# Altium PCB AMTOSC.PcbDoc
Units mm, origin at the board's own origin, x right, y up, seen from the top; angles counter-clockwise.
Board outline 50 x 50 mm, 4 copper layers (Top Layer, Layer 2, Layer 3, Bottom Layer), stack 1.513 mm thick; 38 components, 22 nets, 94 pads, 130 vias.
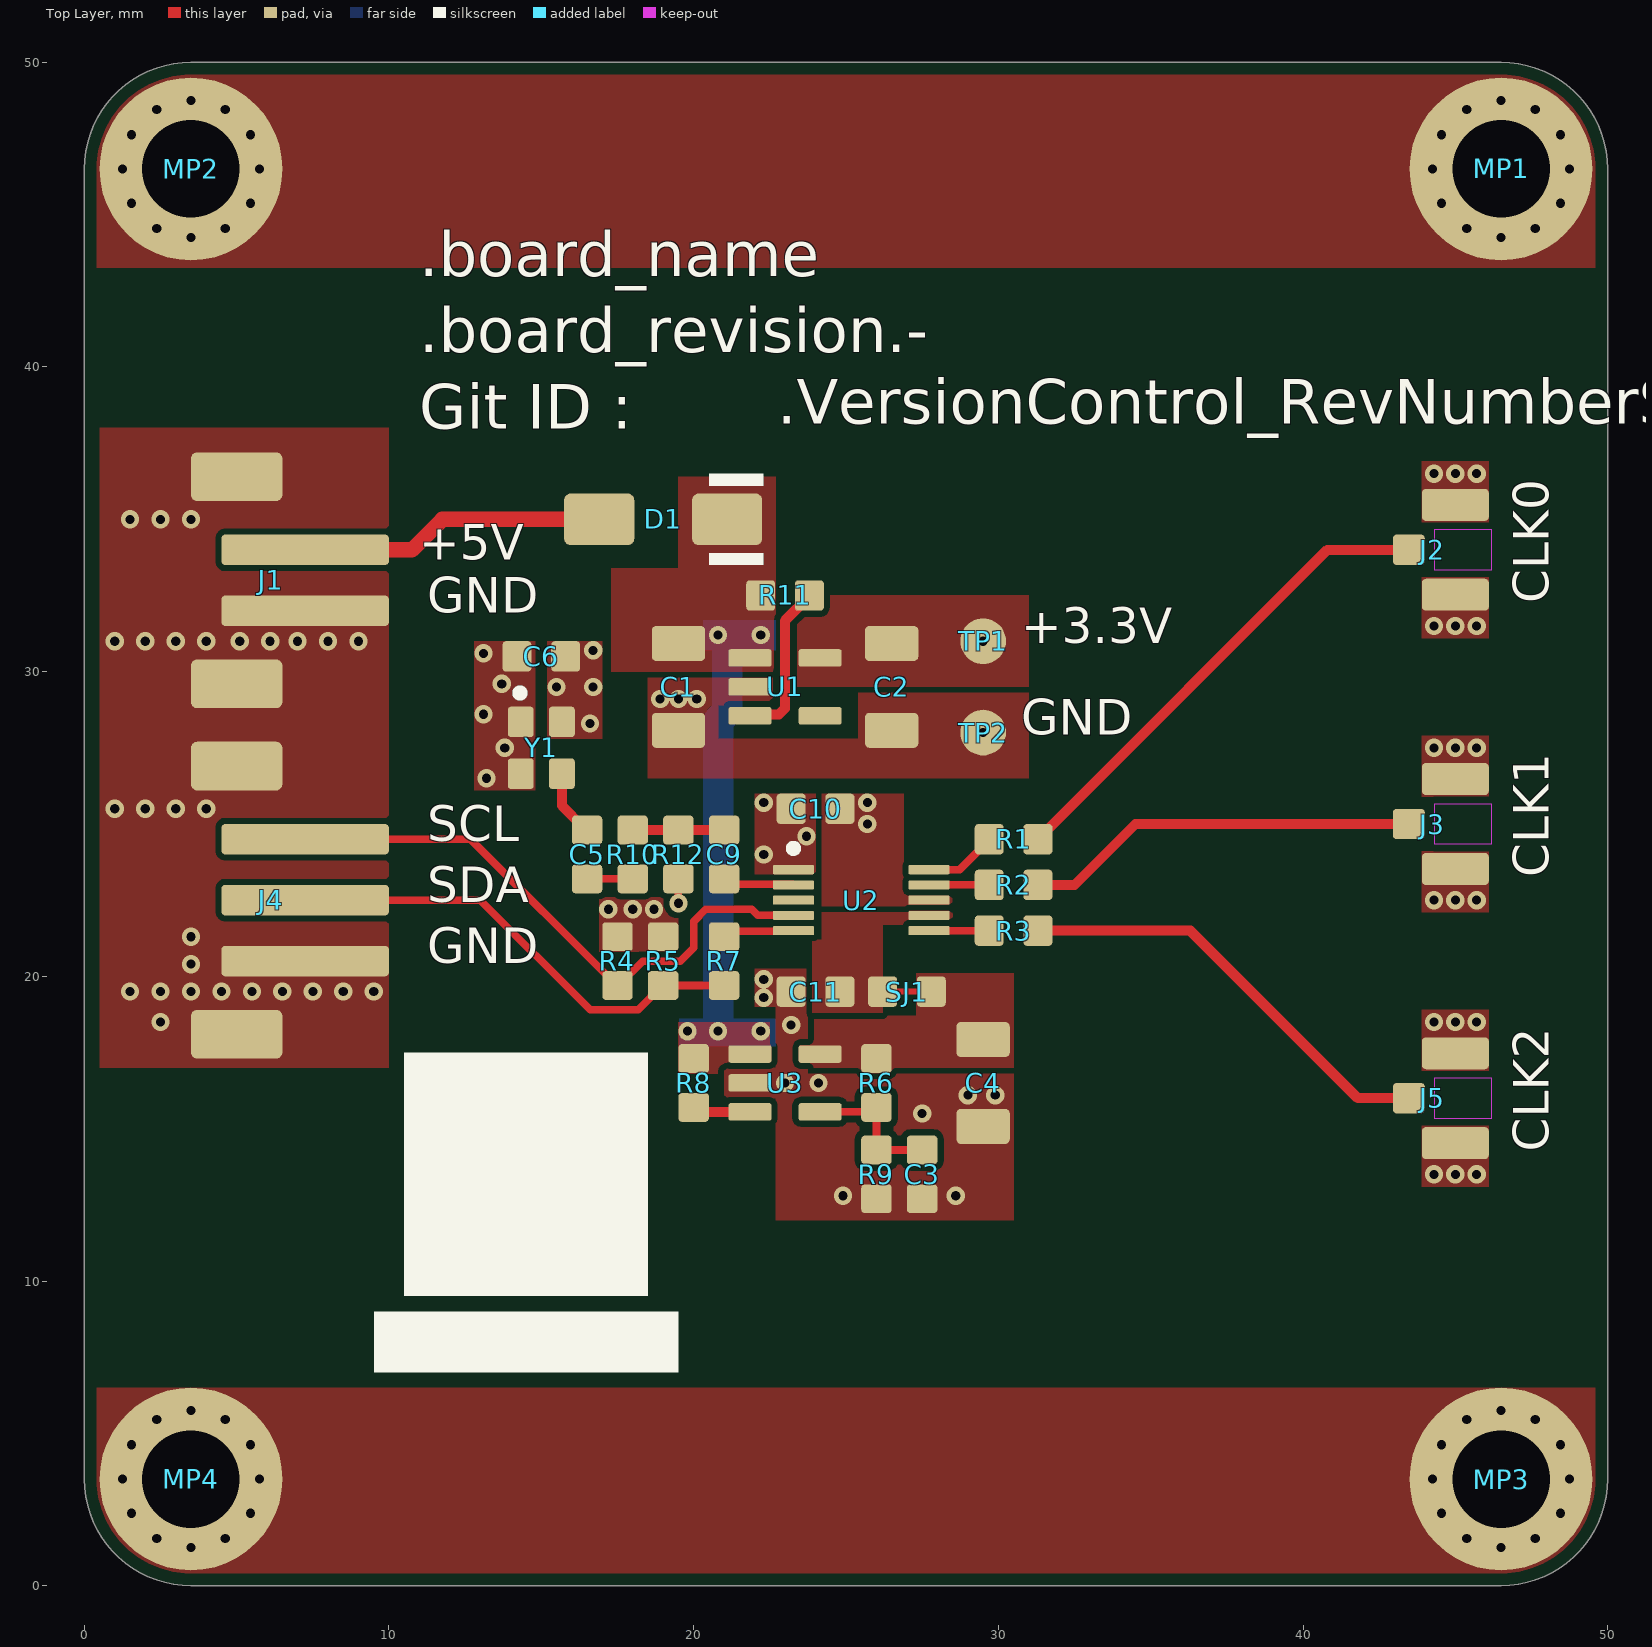
[diagram p0: Top Layer view]
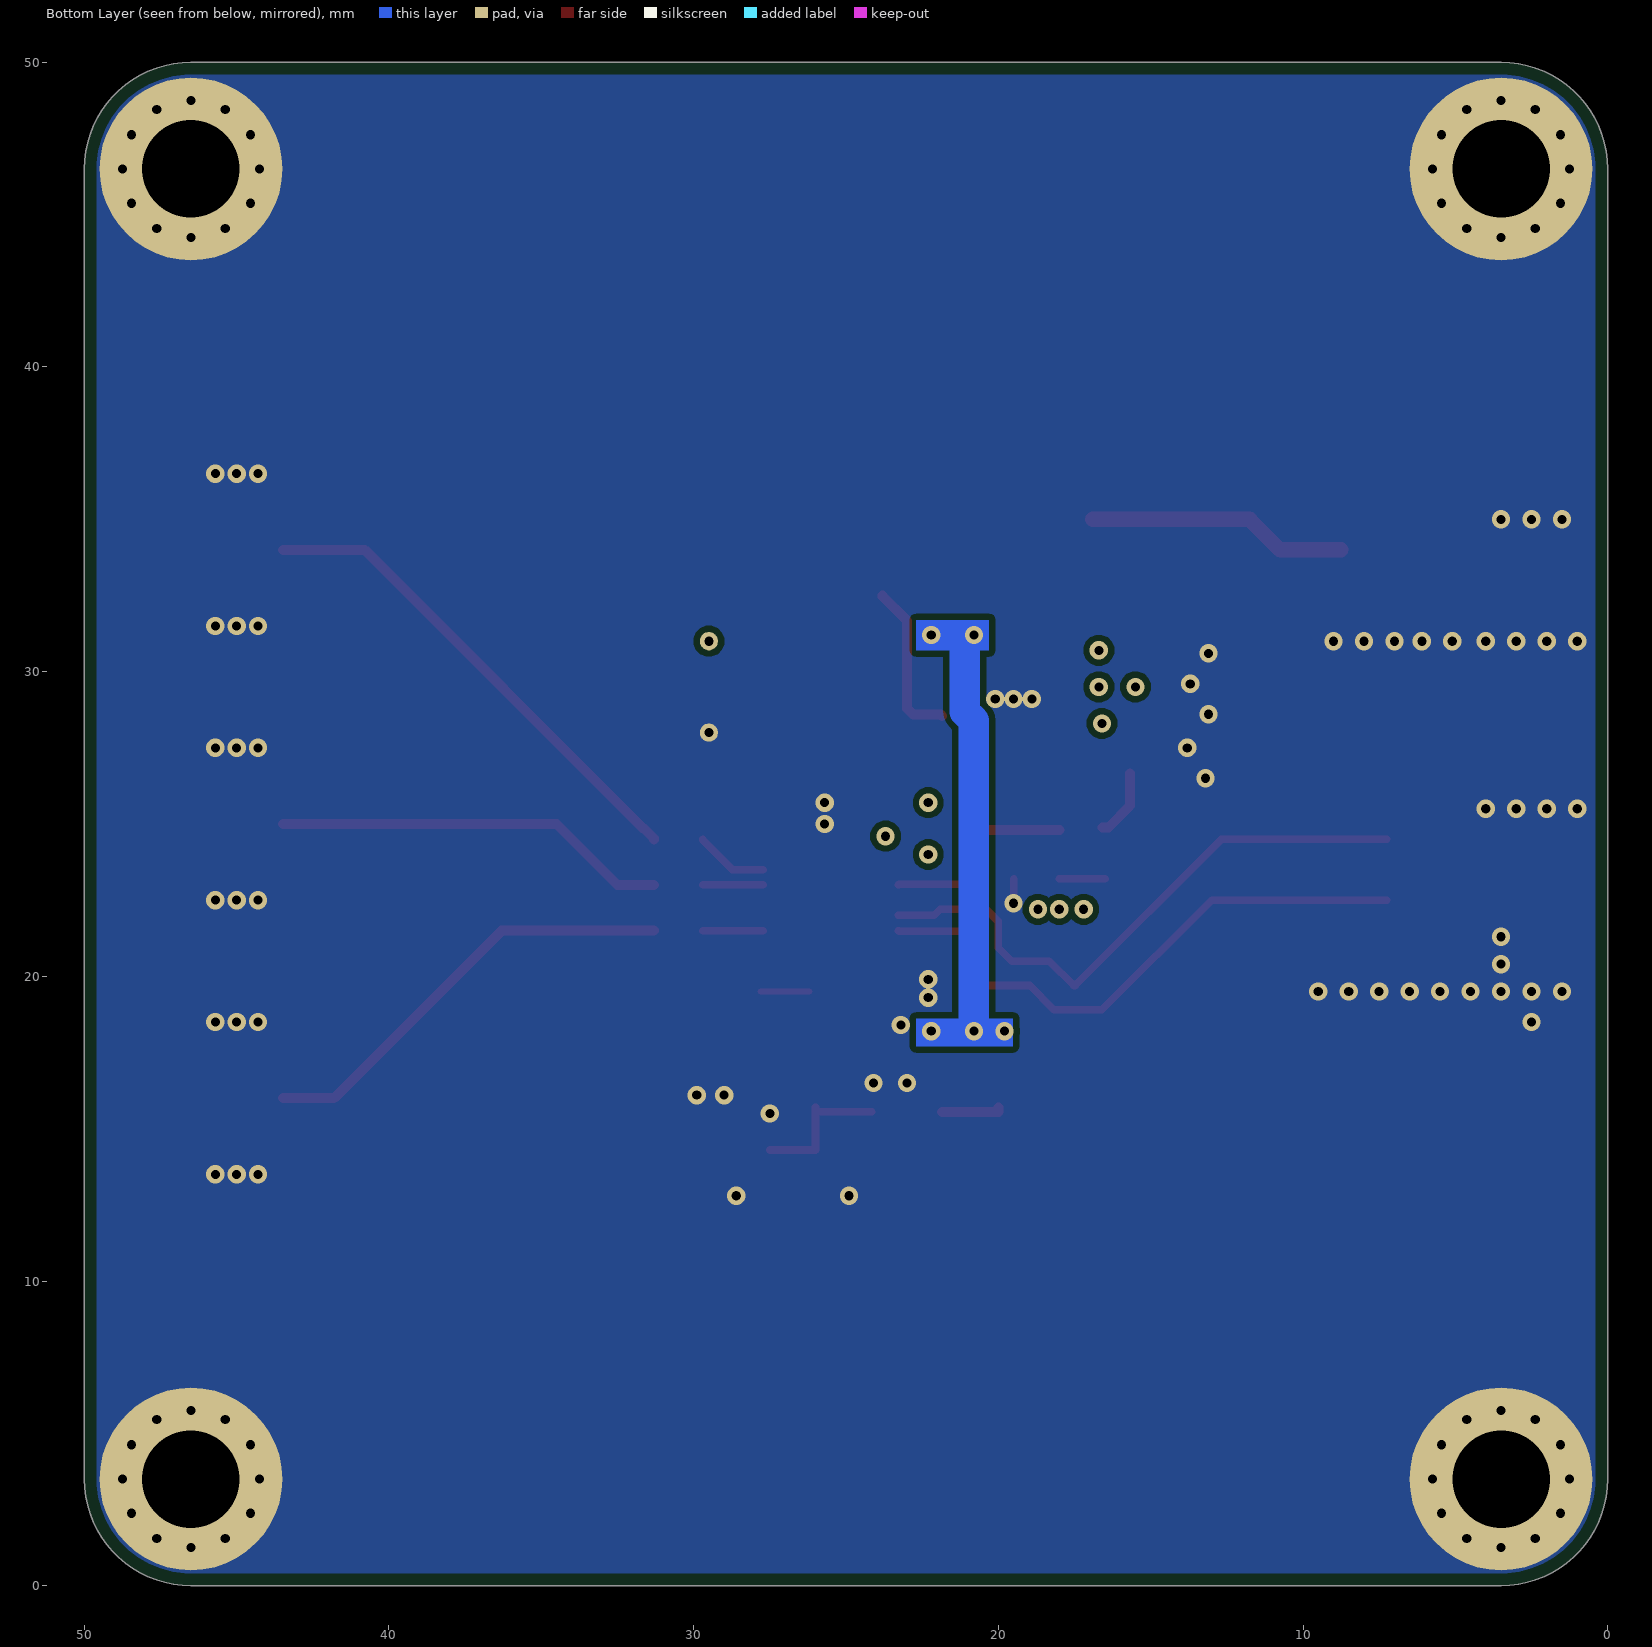
[diagram p1: Bottom Layer view, seen from below]
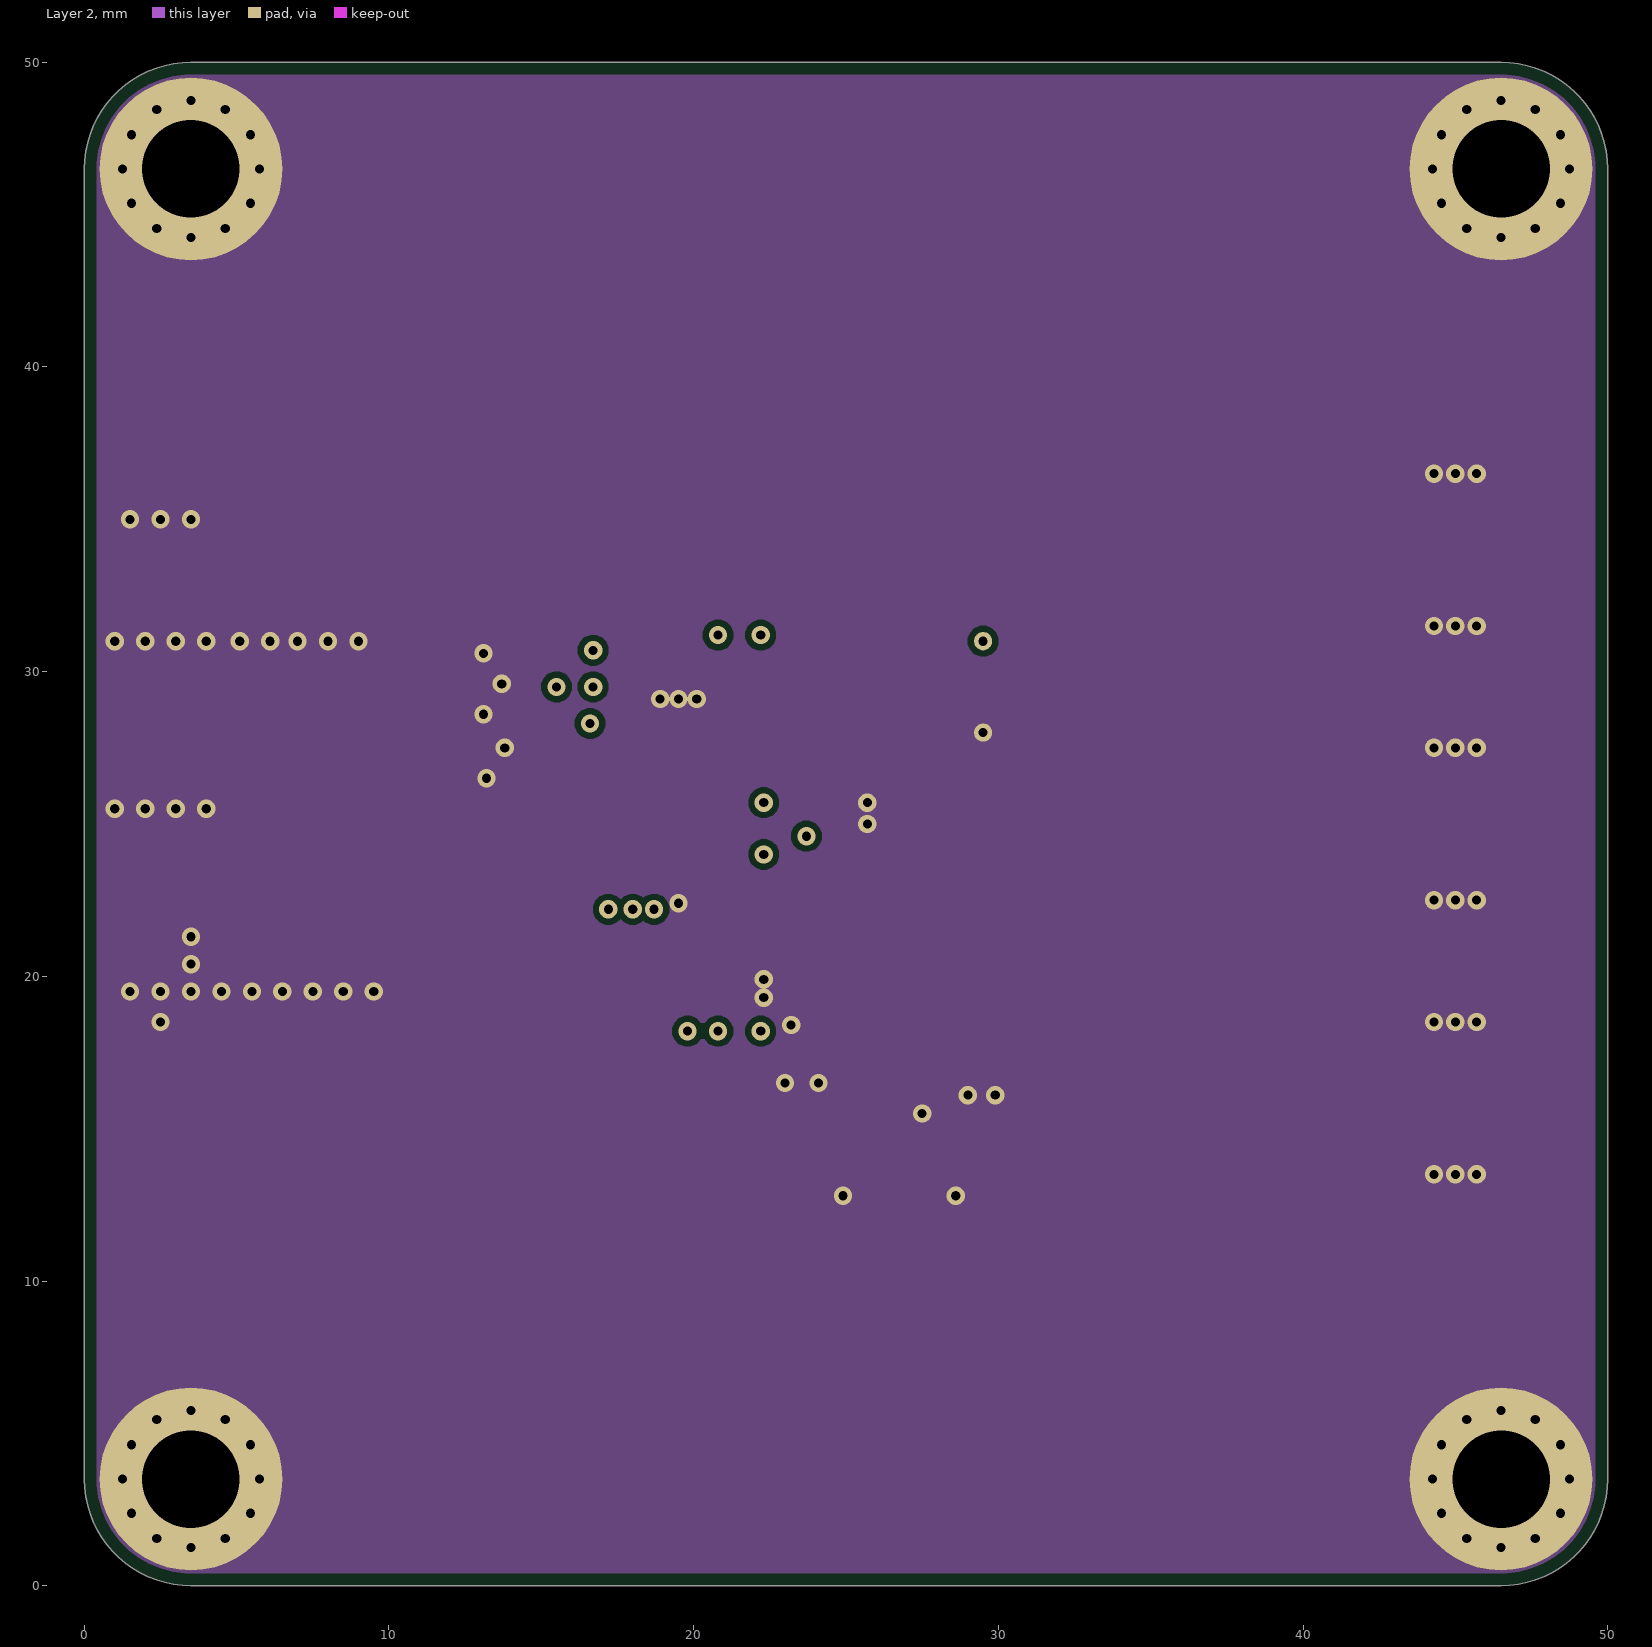
[diagram p2: Layer 2]
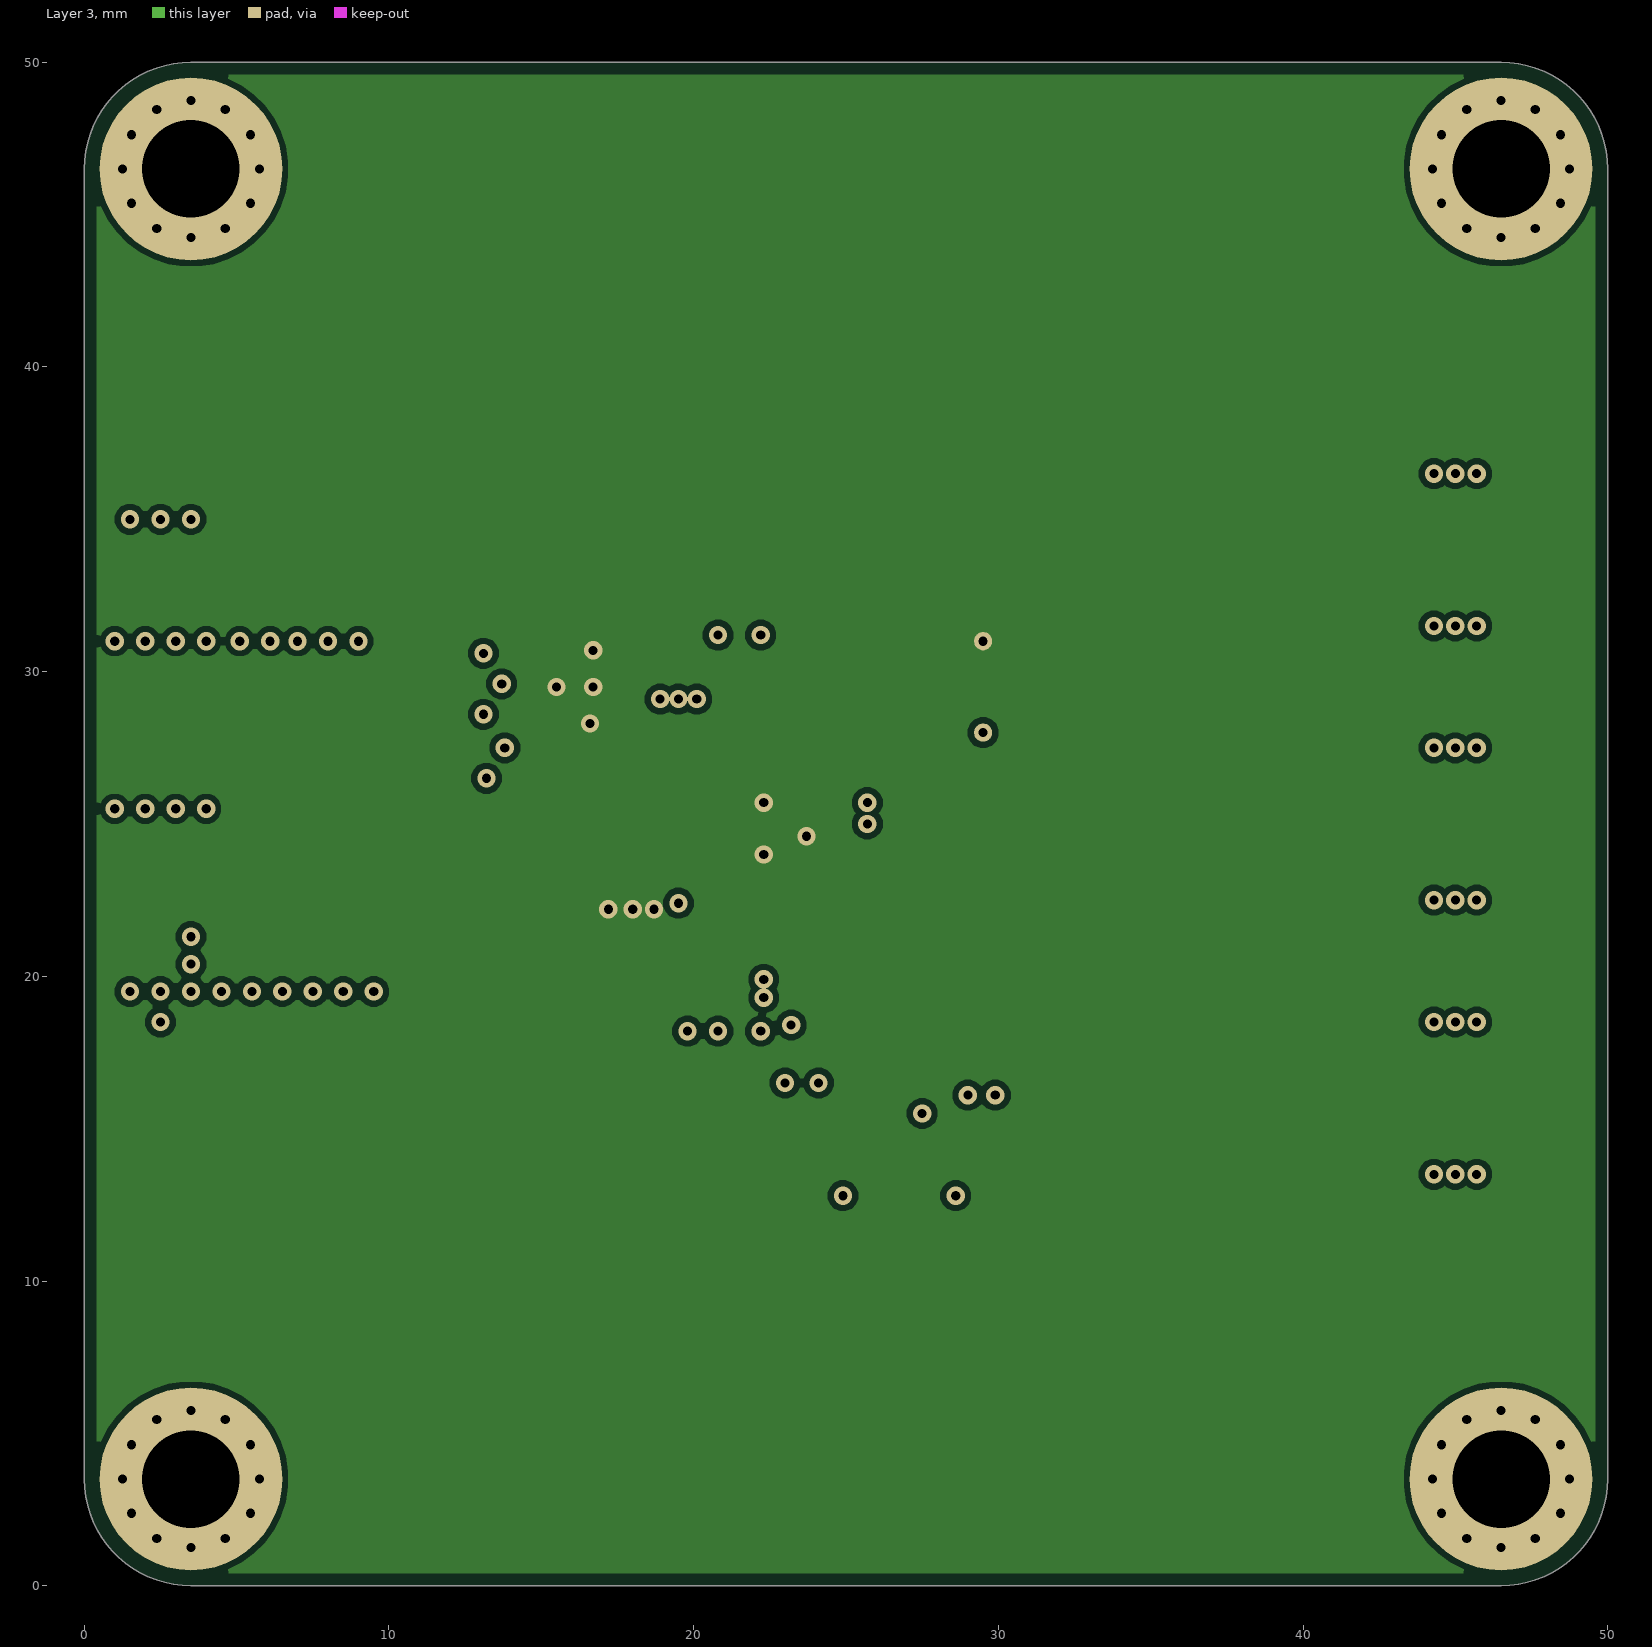
[diagram p3: Layer 3]
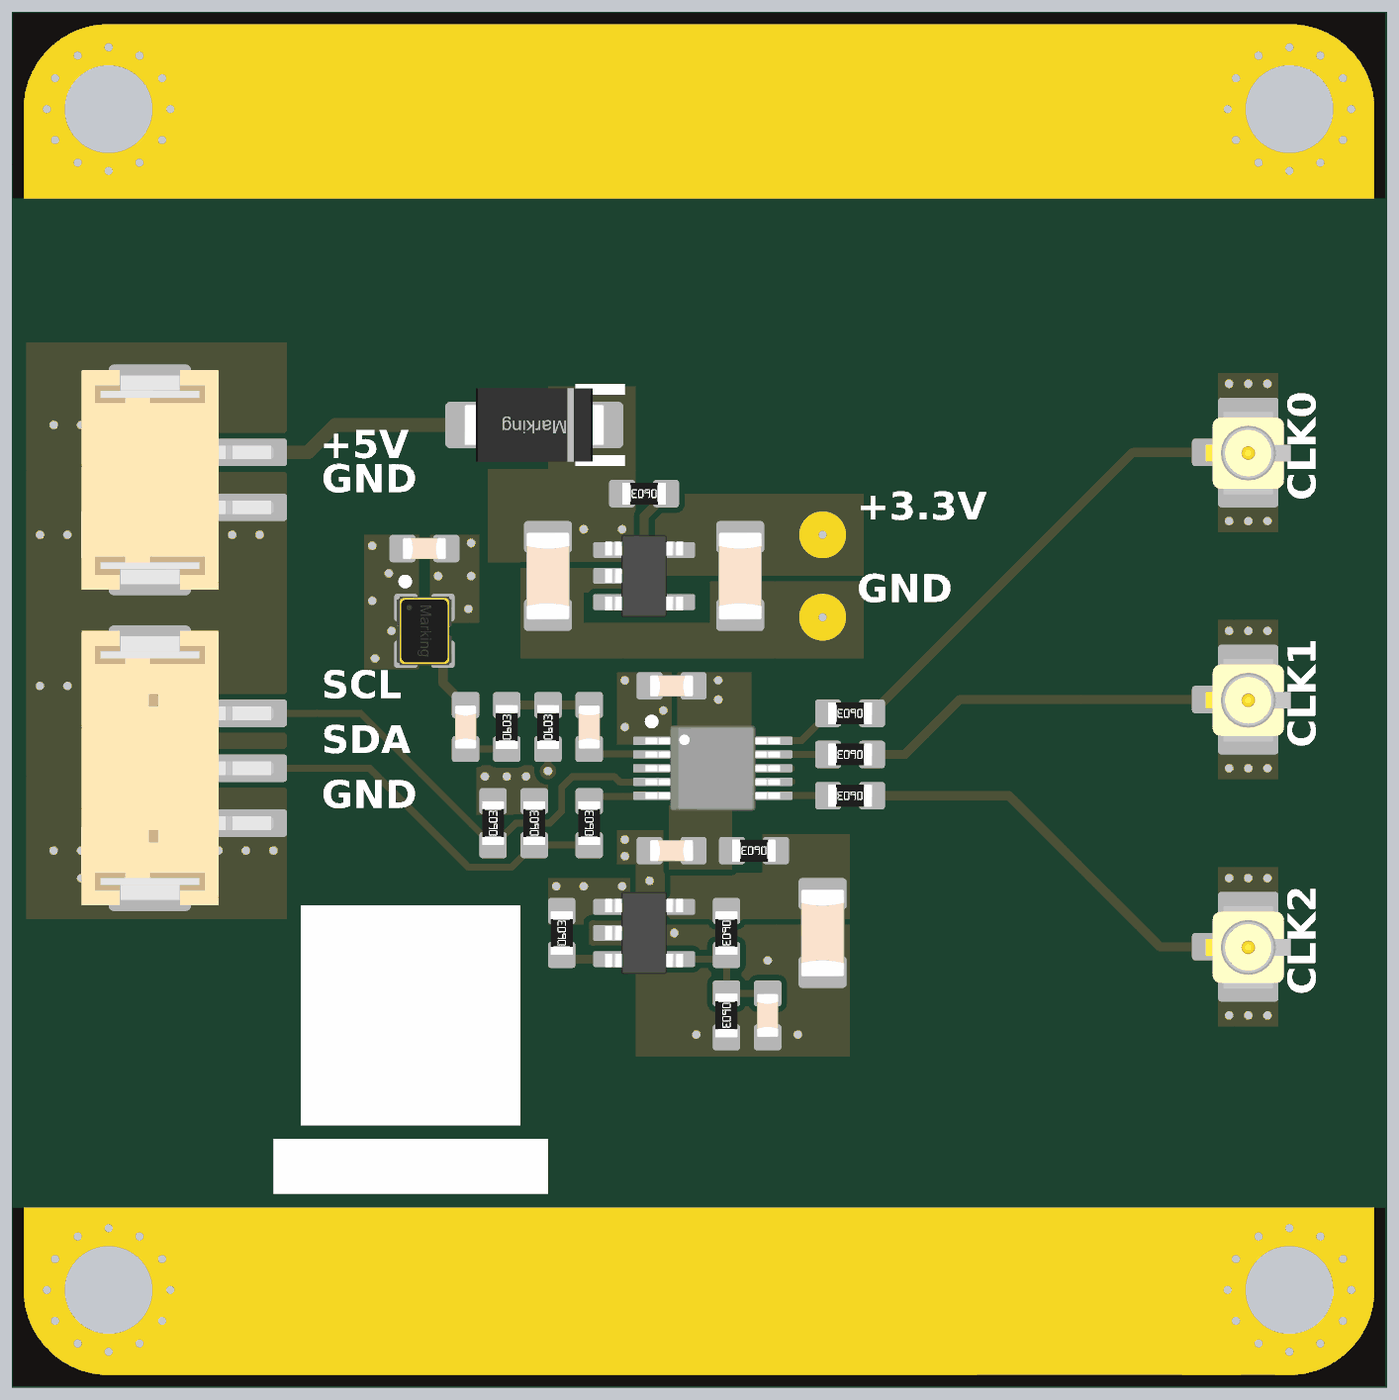
[diagram p4: 3D render of the assembled board from above, using the file's embedded part models]

## Layer stack, top to bottom
Top Solder: solder mask 0.0254, SM-001, Dk 4
Top Layer: signal copper 0.035
Dielectric 2: prepreg 0.2083, PP-022, Dk 4.5
Layer 2: signal copper 0.018
Dielectric 3: core 0.9906, Core-042, Dk 4.6
Layer 3: signal copper 0.018
Dielectric 5: prepreg 0.2083, PP-022, Dk 4.5
Bottom Layer: signal copper 0.035
Bottom Solder: solder mask 0.0254, SM-001, Dk 4

## Board outline
0,3.5 0,46.5 cw(c3.5,46.5) 3.5,50 46.5,50 cw(c46.5,46.5) 50,46.5 50,3.5 cw(c46.5,3.5) 46.5,0 3.5,0 cw(c3.5,3.5)

## Design rules (kind name [scope] priority, off if disabled: settings)
BoardOutlineClearance [IsElectrical or IsPoly] p1: gap=0.4 ignorepadtopadclearanceinfootprint=FALSE
Clearance Clearance_NTPH_to_Track [IsTrack vs IsPad and IsThruPin and not PadIsPlated] p1: gap=0.254 ignorepadtopadclearanceinfootprint=TRUE
Clearance Clearance_TH_Pad_to_TH_Pad [IsPad and IsThruPin vs IsPad and IsThruPin] p2: gap=0.5 ignorepadtopadclearanceinfootprint=TRUE
Clearance Clearance_SMT_Pad_to_SMT_Pad [IsPad and IsSMTPin vs IsPad and IsSMTPin] p3: gap=0.127 ignorepadtopadclearanceinfootprint=TRUE
Clearance [All] p4: gap=0.2 ignorepadtopadclearanceinfootprint=FALSE except(0.127: SMDPad-SMDPad)
ComponentClearance [All] p1: gap=0 collisioncheckmode=3 verticalgap=0.254 showdistances=FALSE
DiffPairsRouting HDMI [InDifferentialPairClass('HDMI')] p1: maxlimit=0.254 minlimit=0.2 mostfreqgap=0.254 toplayer_maxgap=0.2 toplayer_prefgap=0.2 toplayer_minwidth=0.207 toplayer_maxwidth=0.207 toplayer_prefwidth=0.207 midlayer1_minwidth=0.381 midlayer1_maxwidth=0.381 midlayer1_prefwidth=0.381 midlayer2_minwidth=0.381 midlayer2_maxwidth=0.381 midlayer2_prefwidth=0.381 bottomlayer_maxgap=0.2 bottomlayer_prefgap=0.2 bottomlayer_minwidth=0.207 bottomlayer_maxwidth=0.207 bottomlayer_prefwidth=0.207 impedanceprofiledriven=TRUE impedanceprofileid={C10371E8-B84A-4044-89B9-1F0E894B0926} maxuncoupledlength=12.7
DiffPairsRouting ETH [InDifferentialPairClass('ETH')] p2: maxlimit=0.254 minlimit=0.2 mostfreqgap=0.254 toplayer_maxgap=0.2 toplayer_prefgap=0.2 toplayer_minwidth=0.207 toplayer_maxwidth=0.207 toplayer_prefwidth=0.207 midlayer1_minwidth=0.381 midlayer1_maxwidth=0.381 midlayer1_prefwidth=0.381 midlayer2_minwidth=0.381 midlayer2_maxwidth=0.381 midlayer2_prefwidth=0.381 bottomlayer_maxgap=0.2 bottomlayer_prefgap=0.2 bottomlayer_minwidth=0.207 bottomlayer_maxwidth=0.207 bottomlayer_prefwidth=0.207 impedanceprofiledriven=TRUE impedanceprofileid={C10371E8-B84A-4044-89B9-1F0E894B0926} maxuncoupledlength=12.7
DiffPairsRouting USB [InDifferentialPairClass('USB')] p3: maxlimit=0.2 minlimit=0.2 mostfreqgap=0.2 toplayer_minwidth=0.272 toplayer_maxwidth=0.272 toplayer_prefwidth=0.272 midlayer1_minwidth=0.381 midlayer1_maxwidth=0.381 midlayer1_prefwidth=0.381 midlayer2_minwidth=0.381 midlayer2_maxwidth=0.381 midlayer2_prefwidth=0.381 bottomlayer_minwidth=0.272 bottomlayer_maxwidth=0.272 bottomlayer_prefwidth=0.272 impedanceprofiledriven=TRUE impedanceprofileid={14A1D308-0AEB-453A-BA91-52939657512A} maxuncoupledlength=12.7
HoleSize NPTH_HoleSize [IsPad And not PadIsPlated] p1: absolutevalues=TRUE maxlimit=3.7 minlimit=0.2 maxpercent=80.000 minpercent=20.000
HoleSize Pad_HoleSize [IsPad] p2: absolutevalues=TRUE maxlimit=3.2 minlimit=0.3 maxpercent=80.000 minpercent=20.000
HoleSize Via_HoleSize [IsVia] p3: absolutevalues=TRUE maxlimit=6.3 minlimit=0.2 maxpercent=80.000 minpercent=20.000
HoleToHoleClearance [All] p1: gap=0.254 allowstackedmicrovias=FALSE
MatchedLengths InterPair_skew_HDMI [InDifferentialPairClass('HDMI')] p1: tolerance=1 checknetsindiffpair=FALSE checkdiffpairvsdiffpair=TRUE checkxsignals=TRUE checkothers=TRUE
MatchedLengths IntraPair_skew_all_DiffPairs [InDifferentialPairClass('All Differential Pairs')] p2: tolerance=0.15 checknetsindiffpair=TRUE checkdiffpairvsdiffpair=FALSE checkxsignals=FALSE checkothers=FALSE
MinimumAnnularRing [All] p1: minimumring=0.13
MinimumSolderMaskSliver [All] p1: minsoldermaskwidth=0.1
PolygonConnect PolygonConnect_NonSoldering [All vs (HasFootprint('PTH-M3D6.5_VIA-RING') OR HasFootprint('TP_1.5mm_0.3mmHole'))] p1: connectstyle=Direct reliefconductorwidth=0.254 reliefentries=4 polygonreliefangle="90 Angle" airgapwidth=0.254
PolygonConnect [All] p2: thpad.connectstyle=Relief thpad.reliefconductorwidth=0.5 thpad.reliefentries=4 thpad.polygonreliefangle="90 Angle" thpad.airgapwidth=0.254 smdpad.connectstyle=Direct smdpad.reliefconductorwidth=0.5 smdpad.reliefentries=4 smdpad.polygonreliefangle="90 Angle" smdpad.airgapwidth=0.254 via.connectstyle=Direct via.reliefconductorwidth=0.5 via.reliefentries=4 via.polygonreliefangle="90 Angle" via.airgapwidth=0.254
RoutingVias [All] p1: holewidth=0.3 width=0.6 viastyle="Through Hole" minholewidth=0.2 minwidth=0.4 maxholewidth=0.711 maxwidth=1.27
SilkToSolderMaskClearance [IsPad] p1: minsilkscreentomaskgap=0.2 clearancetoexposedcopper=TRUE
SolderMaskExpansion SolderMaskExpansion_Via [IsVia] p1: expansion=0.102 istentingtop=TRUE
SolderMaskExpansion SolderMaskExpansion_notVia [not IsVia] p2: expansion=0.05 istentingtop=FALSE
SupplyNets "Schematic Supply Nets_3" [InNet('VDDO')] p1: voltage=0.000
SupplyNets "Schematic Supply Nets_2" [InNet('+5V')] p2: voltage=0.000
SupplyNets "Schematic Supply Nets_1" [InNet('+3.3V')] p3: voltage=0.000
SupplyNets "Schematic Supply Nets" [InNet('GND')] p4: voltage=0.000
Width [All] p1: maxlimit=2.5 minlimit=0.2 preferedwidth=0.33
24 further rules are at their usual default settings.

## Components (designator, comment, footprint, x,y, rotation, side; value= is the part's Value field where it differs from the comment)
C1 "Capacitor 10µF +/-10% 10V X7R 1206" 1206-C-N 19.5,29.5 r90 top value=10µF
C2 "Capacitor 10µF +/-10% 10V X7R 1206" 1206-C-N 26.5,29.5 r90 top value=10µF
C3 "Capacitor 10nF 50V NP0 0603" 0603-C-N 27.5,13.5 r90 top value=10nF
C4 "Capacitor 10µF +/-10% 10V X7R 1206" 1206-C-N 29.5,16.5 r90 top value=10µF
C5 "Capacitor 10nF 50V NP0 0603" 0603-C-N 16.5,24 r270 top value=10nF
C6 "Capacitor 100nF +/-10% 50V X7R 0603" 0603-C-N 15,30.5 r180 top value=100nF
C9 "Capacitor 10nF 50V NP0 0603" 0603-C-N 21,24 r90 top value=10nF
C10 "Capacitor 100nF +/-10% 50V X7R 0603" 0603-C-N 24,25.5 r0 top value=100nF
C11 "Capacitor 100nF +/-10% 50V X7R 0603" 0603-C-N 24,19.5 r180 top value=100nF
D1 "B340AF-13" DO-214AC_UNI 19,35 r180 top
J1 "620302124022" 620302124022 5,33 r270 top value=JST-PH
J2 "U.FL-R-SMT(10)" HRS-U.FL-R-SMT_V 45,34 r270 top value=U.FL
J3 "U.FL-R-SMT(10)" HRS-U.FL-R-SMT_V 45,25 r270 top value=U.FL
J4 "620303124022" 620303124022 5,22.5 r270 top value=JST-PH
J5 "U.FL-R-SMT(10)" HRS-U.FL-R-SMT_V 45,16 r270 top value=U.FL
MP1 "MountingHole" PTH-M3D6.5_VIA-RING 46.5,46.5 r0 top
MP2 "MountingHole" PTH-M3D6.5_VIA-RING 3.5,46.5 r0 top
MP3 "MountingHole" PTH-M3D6.5_VIA-RING 46.5,3.5 r0 top
MP4 "MountingHole" PTH-M3D6.5_VIA-RING 3.5,3.5 r0 top
R1 "Jumper 0R <50 mOhm 1A 0603" 0603-R-N 30.5,24.5 r180 top value=0
R2 "Jumper 0R <50 mOhm 1A 0603" 0603-R-N 30.5,23 r180 top value=0
R3 "Jumper 0R <50 mOhm 1A 0603" 0603-R-N 30.5,21.5 r180 top value=0
R4 "Resistor 3.3k +/-1% 50V 0603" 0603-R-N 17.5,20.5 r90 top value=3.3k
R5 "Resistor 3.3k +/-1% 50V 0603" 0603-R-N 19,20.5 r90 top value=3.3k
R6 "Resistor 3.3k +/-1% 50V 0603" 0603-R-N 26,16.5 r270 top value=3.3k
R7 "Resistor 27R +/-1% 0.1W 0603" 0603-R-N 21,20.5 r90 top value=27
R8 "Resistor 3.3k +/-1% 50V 0603" 0603-R-N 20,16.5 r90 top value=3.3k
R9 "Resistor 3.3k +/-1% 50V 0603" 0603-R-N 26,13.5 r270 top value=3.3k
R10 "Resistor 1k +/-1% 50V 0603" 0603-R-N 18,24 r90 top value=1k
R11 "Resistor 3.3k +/-1% 50V 0603" 0603-R-N 23,32.5 r180 top value=3.3k
R12 "Resistor 220R +/-1% 0.1W 0603" 0603-R-N 19.5,24 r90 top value=220
SJ1 "SJ-0603-1A" SJ_0603_1A 27,19.5 r180 top net-tie value=0
TP1 "Testpad with multiple sizes" TP_1.5mm_0.3mmHole 29.5,31 r0 top
TP2 "Testpad with multiple sizes" TP_1.5mm_0.3mmHole 29.5,28 r0 top
U1 "XC6220B331MR-G" SOT25-N 23,29.5 r0 top value=3V3/1A
U2 "SI5351A-B-GTR" VSSOP10-N 25.5,22.5 r0 top
U3 "AP2205-W5-7" SOT25-N 23,16.5 r0 top
Y1 "SX2T25.000B010J020S" WE-SPXO_IQXO-791 15,27.5 r270 top value="TCXO 25.0MHz"

## Footprints (in the part's own frame and the unit in brackets; to place one, negate y for a bottom-side part, rotate by r counter-clockwise, add the part's x,y. Pads: shape width x height; smd on the part's side, far side on the other; paste and mask are expansions set on the pad)
0603-C-N [mm]
  rrect25% 0.95x1 smd: 1(-0.8,0) 2(0.8,0)
  body extent -0.8,-0.4 0.8,0.4, height 0.81
0603-R-N [mm]
  rrect25% 0.95x1 smd: 1(-0.8,0) 2(0.8,0)
  body extent -0.8,-0.4 0.8,0.4, height 0.47
1206-C-N [mm] "Chip Capacitor, 2-Leads, 1206, IPC Medium Density"
  rrect25% 1.15x1.75 smd: 1(-1.425,0) 2(1.425,0)
  body extent -1.6,-0.8 1.6,0.8, height 1.16
620302124022 [mm] "2.00mm SMT Male Vertical Shrouded Header, 2p"
  rrect25% 1x5.5 smd: 1(1,2.25) 2(-1,2.25)
  rrect25% 1.6x3 smd: MP1(-3.4,0) MP2(3.4,0)
  body extent -4,-2.5 4,4.51, height 6.77
620303124022 [mm] "2.00mm SMT Male Vertical Shrouded Header, 3p"
  rrect25% 1x5.5 smd: 1(2,2.25) 2(0,2.25) 3(-2,2.25)
  rrect25% 1.6x3 smd: MP1(-4.4,0) MP2(4.4,0)
  body extent -5,-2.5 5,4.51, height 6.77
DO-214AC_UNI [mm] "SMA : 2-Leads. body 4.24x2.67mm"
  rrect25% 2.3x1.7 smd: 1(-2.1,0) 2(2.1,0)
  silkscreen extent -3.3,-1.5 -1.5,1.5, body extent -2.56,-1.33 2.56,1.34, height 2.24
HRS-U.FL-R-SMT_V [mm] "SMD, 3-Leads, Body 2.6x2.6mm"
  rrect25% 1.05x2.2 smd: 1(-1.475,0) 2(1.475,0)
  rrect25% 1x1.05 smd: 3(0,-1.525)
  Top Layer keep-out region: -0.65,-0.7 0.65,-0.7 0.65,1.2 -0.65,1.2
  body extent -1.48,-1.55 1.52,1.55, height 1.25
PTH-M3D6.5_VIA-RING [mm]
  round 6 hole 3.2: 1(0,0)
SJ_0603_1A [mm]
  rrect25% 0.95x1 smd: 1(-0.8,0) 2(0.8,0)
  Top Layer lines w0.2: 0.8,0 -0.8,0
  body extent -0.8,-0.4 0.8,0.4, height 0.47
SOT25-N [mm] "SOT-23-5 IPC Nominal, EIAJ SC-74A, SOT753, TSOP5"
  rrect25% 1.407x0.576 smd: 1(-1.151,0.95) 2(-1.151,0) 3(-1.151,-0.95) 4(1.151,-0.95) 5(1.151,0.95)
  body extent -1.42,-1.5 1.42,1.5, height 1.2
TP_1.5mm_0.3mmHole [mm] "Centering hole to keep your DMM-probe in place so that it doesn't skid off to other signals."
  round 1.5 / inner round 0.6 / far side round 0.6 hole 0.3 mask+0.102: 1(0,0)
VSSOP10-N [mm] "MSOP10, TSSOP, 10-Leads, Body 3.00x3.00mm, Pitch 0.50mm, IPC Medium Density"
  rrect25% 1.35x0.3 smd: 1(-2.225,1) 2(-2.225,0.5) 3(-2.225,0) 4(-2.225,-0.5) 5(-2.225,-1) 6(2.225,-1) 7(2.225,-0.5) 8(2.225,0) 9(2.225,0.5) 10(2.225,1)
  silkscreen extent -2.35,1.58 -2.1,1.82, body extent -2.45,-1.55 2.45,1.55, height 1.1
WE-SPXO_IQXO-791 [mm] "Simple Packaged Quartz Oscillator, body 2.5x2mm"
  rrect25% 1x0.85 smd: 1(-0.85,-0.675) 2(0.85,-0.675) 3(0.85,0.675) 4(-0.85,0.675)
  silkscreen extent -1.92,-0.82 -1.68,-0.57, body extent -1.25,-1 1.25,1, height 0.85

## Part data
C1 C2 C4: library part CMP-072-000777-17, "WCAP-CSGP Multilayer Ceramic Chip Capacitor, General Purpose, size 1206, X7R, 10µF, 10VDC", Capacitor Type=MLCC, Case/Package=1206, Dielectric=X7R, Insulation Resistance=0.01GO, JLCPCB Part #=C70462, Max Operating Temperature=125°C, Min Operating Temperature=-55°C, Tolerance=10%, Voltage Rating=10V, ComponentLink1Description="Website Link", ComponentLink1URL=https://www.we-online.com/redexpert/article/885012208018?ad, ComponentLink2Description="Datasheet Link", ComponentLink2URL=https://www.we-online.com/redexpert/spec/885012208018?ad, Design Item ID=885012208018, Dissipation Factor=10%, FLIR Part #=YCAM10U-9, Height=1.6mm, Length=3.2mm, Match Code=WCAP-CSGP, Mounting Technology=SMT, Packaging="Tape and Reel", Pins=2, Source=WCAP-CSGP.SchLib, Technical Reference=X7R1206106K010DFCT10000, Usage="General Purpose", Width=1.6mm
C3 C5 C9: library part CMP-001-00137-6, "Multilayer Ceramic Capacitor, Grm Series, 0.01 F, 5%, C0g / Np0, 50 V, 0603 [1608 Metric]", Case Code (Imperial)=0603, Case Code (Metric)=1608, Dielectric=C0G, JLCPCB Part #=C85973, Max Operating Temperature=125°C, Min Operating Temperature=-55°C, Package Quantity=4000, Temperature Coefficient=30ppm/°C, Tolerance=5%, Voltage=50V, Case/Package=0603, Depth=0.8mm, FLIR Part #=YCAM10N-7, Height=0.8mm, Lead Free="Lead Free", Lead Pitch=0.5mm, Length=1.6mm, Material=Ceramic, Mounting Technology="Surface Mount", Packaging="Cut Tape", Reach SVHC Compliant=No, RoHS Compliant=Yes, Series=GRM, Termination=SMD/SMT, Thickness=0.035inch, Voltage Rating=50V, Voltage Rating (DC)=50V, Width=0.8mm
C6 C10 C11: library part CMP-072-000619-16, "WCAP-CSGP Multilayer Ceramic Chip Capacitor, General Purpose, size 0603, X7R, 100nF, 50VDC", Capacitor Type=MLCC, Case/Package=0603, Dielectric=X7R, Insulation Resistance=5GO, JLCPCB Part #=C14663, Max Operating Temperature=125°C, Min Operating Temperature=-55°C, Tolerance=10%, Voltage Rating=50V, ComponentLink1Description="Website Link", ComponentLink1URL=https://www.we-online.com/redexpert/article/885012206095?ad, ComponentLink2Description="Datasheet Link", ComponentLink2URL=https://www.we-online.com/redexpert/spec/885012206095?ad, Design Item ID=885012206095, Dissipation Factor=3%, Height=0.8mm, Length=1.6mm, Match Code=WCAP-CSGP, Mounting Technology=SMT, Packaging="Tape and Reel", Pins=2, Source=WCAP-CSGP.SchLib, Technical Reference=X7R0603104K050DFCT10000, Usage="General Purpose", Width=0.8mm
D1: library part CMP-004-00050-6, "Diode 40 V 3A Surface Mount SMAF", Case/Package=SMA, Forward Current=3A, Forward Voltage="500 mV @ 3 A", JLCPCB Part #=C172880, Max Reverse Voltage (DC)=40V, Mounting Technology="Surface Mount", Packaging="Cut Tape", RoHS Compliant=Yes, Series=-
J1: library part CMP-047-000049-10, "WR-WTB SMT Male Vertical Shrouded Header, pitch 2mm, 2p", Contact Resistance=20mOhm, JLCPCB Part #=C18077899, Operating Temperature="-25 to +85degC", Rated Current=2A, Withstanding Voltage=800VAC, Working Voltage=100VAC, Component Type=Standard, ComponentLink1Description=Manufacturer, ComponentLink1URL=http://www.we-online.de, ComponentLink2Description=Datasheet, ComponentLink2URL=https://www.we-online.com/catalog/datasheet/620302124022.pdf, Design Item ID=620302124022, Gender=Male, Mounting Technology=SMT, Packaging="Tape and Reel", Part Number=620302124022, Pin Count=2, Pin Number=2, Pitch=2mm, Published Date="January 2020", Publisher="Wurth Elektronik", Source=WR-WTB_2.00mm.SchLib, Type=Vertical
J2 J3 J5: library part CMP-002-00035-12, "Ultra Small Surface Mount Coaxial Connector, 50 Ohm, -40 to 90 degC, 3-Pin SMD, RoHS, Tape and Reel", Case/Package=U.FL-R-SMT, JLCPCB Part #=C88373, Manufacturer="Hirose Electric", Max Operating Temperature=90°C, Min Operating Temperature=-40°C, Package Description="3-Pin Surface Mount Device, Body 2.6 x 2.6 mm", Package Quantity=2500, Resistance=50Ohm, Connector Type=RF&Coax, Contact Material=Brass, Contact Plating=Gold, Datasheet URL=https://www.hirose.com/product/en/download_file/key_name/U.FL/category/Catalog/doc_file_id/31697/?file_category_id=4&item_id=15&is_series=1, Datasheet Version=Aug-16, Fastening Type=Snap, Impedance=50Ohm, Manufacturer URL=https://www.hirose.com, Mounting Technology=SM, Package Reference=U.FL-R-SMT, Packaging=TapeandReel, RoHS Compliant=True
J4: library part CMP-047-000050-9, "WR-WTB SMT Male Vertical Shrouded Header, pitch 2mm, 3p", Contact Resistance=20mOhm, JLCPCB Part #=C160353, Operating Temperature="-25 to +85degC", Rated Current=2A, Withstanding Voltage=800VAC, Working Voltage=100VAC, Component Type=Standard, ComponentLink1Description=Manufacturer, ComponentLink1URL=http://www.we-online.de, ComponentLink2Description=Datasheet, ComponentLink2URL=https://www.we-online.com/catalog/datasheet/620303124022.pdf, Design Item ID=620303124022, Gender=Male, Mounting Technology=SMT, Packaging="Tape and Reel", Part Number=620303124022, Pin Count=3, Pin Number=3, Pitch=2mm, Published Date="January 2020", Publisher="Wurth Elektronik", Source=WR-WTB_2.00mm.SchLib, Type=Vertical
MP1 MP2 MP3 MP4: library part CMP-00028-00004-15, "Mounting hole.  Add this so that mounting holes placed in your design don't automagically disappear when you import changes from the schematic.", Pins=1
R1 R2 R3: library part CMP-009-00006-26, "Chip Jumper, Thick Film, Jumper, 0603, 100mW, 1A, 0 Ohm, <50 mOhm", Case/Package=0603, Current Rating=1A, JLCPCB Part #=C21189, Max Operating Temperature=155°C, Min Operating Temperature=-55°C, Power Rating=100mW, Resistor Type="Thick Film", Tolerance="50 mOhm", Voltage Rating=75V, Elements=1, FLIR Part #=YRES0E-1, Mounting Technology=SMT, Page Part #=ROQJ0000, Pins=2, RoHS Compliant=True, Usage=Jumper
R4 R5 R6 R8 R9 R11: library part CMP-009-00243-18, "Chip Resistor, Thick Film, General Purpose, 0603, 100mW, 50V, 3.3 kOhm, +/-1%", Case/Package=0603, JLCPCB Part #=C22978, Max Operating Temperature=155°C, Min Operating Temperature=-55°C, Power Rating=100mW, Resistor Type="Thick Film", Tolerance=1%, Voltage Rating=50V, Elements=1, Mounting Technology=SMT, Page Part #=ROQF3301, Pins=2, RoHS Compliant=Yes, Usage="General Purpose"
R7: library part CMP-009-00280-11, "Res Thick Film 1.6 x 0.8 mm 27 Ohm 1% 0.1W(1/10W) 100ppm/ C Molded SMD Paper T/R", Case/Package=0603, JLCPCB Part #=C25190, Max Operating Temperature=155°C, Min Operating Temperature=-55°C, Power Rating=100mW, Resistor Type="Thick Film", Tolerance=1%, Elements=1, Mounting Technology=SMT, Page Part #=ROQF2709, Pins=2, Usage="General Purpose"
R10: library part CMP-009-00014-29, "Chip Resistor, Thick Film, General Purpose, 0603, 100mW, 50V, 1 kOhm, +/-1%", Case/Package=0603, JLCPCB Part #=C21190, Max Operating Temperature=155°C, Min Operating Temperature=-55°C, Power Rating=100mW, Resistor Type="Thick Film", Tolerance=1%, Voltage Rating=50V, Elements=1, FLIR Part #=YRES1K-1, Mounting Technology=SMT, Page Part #=ROQF1001, Pins=2, RoHS Compliant=Yes, Usage="General Purpose"
R12: library part CMP-009-00390-1, "Res Thick Film 0603 220 Ohm 1% 0.1W(1/10W) ±100ppm/C Pad SMD T/R Automotive AEC-Q200", Case Code (Imperial)=0603, Case Code (Metric)=1608, JLCPCB Part #=C22962, Max Operating Temperature=155°C, Max Power Dissipation=100mW, Min Operating Temperature=-55°C, Temperature Coefficient=100ppm/°C, Tolerance=1%, Voltage Rating=75V, Case/Package=0603, Contact Plating=Tin,Matte, Features="Automotive AEC-Q200", Height=0.022inch, Lead Free="Lead Free", Length=0.061inch, Mounting Technology="Surface Mount", Number of Terminations=2, Packaging="Tape and Reel", Power Rating=100mW, Radiation Hardening=No, RoHS Compliant=Yes, Series=RMCF, Width=0.031inch
SJ1: library part CMP-009-00345-4, "Solder Jumper, Thick Film, Jumper, 0603, 100mW, 1A, 0 Ohm, <50 mOhm", Case/Package=0603, JLCPCB Part #=C876125, Max Operating Temperature=155°C, Min Operating Temperature=-55°C, Power Rating=100mW, Resistor Type="Thick Film", Temperature Coefficient=200ppm/°C, Tolerance="50 mOhm", Voltage Rating=50V, Elements=1, Lead Free="Lead Free", Mounting Technology=SMT, Pins=2, RoHS Compliant=Yes, Usage=Jumper
TP1 TP2: library part CMP-027-000000-17, "Testpad land", Component Type=Standard, Design Item ID=Testpad, Pin Count=1
U1: library part CMP-019-00081-11, "Fixed LDO 3.3V, 1%, 1A, Iq 108uA, -40°C to 85°C", Case/Package=SOT-23-5, JLCPCB Part #=C86534, Max Input Voltage=6V, Max Operating Temperature=85°C, Min Input Voltage=4V, Min Operating Temperature=-40°C, Output Current=1A, Output Voltage=3.3V, Quiescent Current=108uA, Accuracy=1%, Mount=SMT, Number of Outputs=1, Number of Regulators=1, Output Type=Fixed
U2: library part CMP-023-00007-2, "IC CLK GENERATOR 160MHZ 10MSOP", Case/Package=MSOP, Clock Frequency=200MHz, JLCPCB Part #=C504891, Max Operating Temperature=85°C, Min Operating Temperature=-40°C, Operating Supply Current=22mA, Operating Supply Voltage=3.3V, Package Quantity=2500, Input=Crystal, Max Duty Cycle=55%, Mounting Technology="Surface Mount", Number of Circuits=2, Number of Outputs=3, Packaging="Tape and Reel", Pins=10, PLL=Yes, RoHS Compliant=Yes, Series=MultiSynth™
U3: library part CMP-019-00084-11, "Variable LDO 1.24V - 22V, , 250mA, Iq 2.5mA, -40°C to 125°C", Case/Package=SOT-25, JLCPCB Part #=C3001658, Max Input Voltage=24V, Max Operating Temperature=125°C, Min Operating Temperature=-40°C, Output Current=250mA, Output Voltage="1.24V - 22V", Power Supply Rejection Ratio (PSRR)=60dB, Quiescent Current=2.5mA, Mount=SMT, Number of Outputs=1, Number of Regulators=1, Output Type=Variable
Y1: library part CMP-002-001569-1, "TCXO 25MHz, 3.3V", Frequency Tolerance=1ppm, JLCPCB Part #=C5180005

## Via types
v1: diameter 0.6, hole 0.3, Top Layer to Bottom Layer, tented both sides, 130 vias

## Nets (pads, with @x,y where several pads share a name; then routed paths per layer and width w, separated by ;. In a path a pad name is that pad's centre, name@x,y a point inside that pad or via, vN(x,y) a via of type N, cw(c..) or ccw(c..) an arc to the next point about the centre after c; other vN are vias at no path point)
+3.3V: C2.2 C6.1 C10.1 R4.2 R5.2 TP1.1 U1.5 U2.1 Y1.4
  other v1: 17.2,22.2 18,22.2 18.7,22.2 22.3,24 23.7,24.6 22.3,25.7 16.6,28.3 15.5,29.5 16.7,29.5 16.7,30.7
+5V: C1.2 D1.1 R8.2 R11.2 U1.1 U3.1 | length 13.2
  Bottom Layer w1: v1(20.8,18.2) 20.8,28.386 21.1,28.686 21.1,30.9 v1(20.8,31.2)
  other v1: 19.8,18.2 22.2,18.2 22.2,31.2
CLK0: J2.3 R1.1 | length 16.1
  Top Layer w0.33: R1.1 31.3,24.525 31.61,24.835 31.635,24.835 40.8,34 J2.3
CLK1: J3.3 R2.1 | length 13
  Top Layer w0.33: R2.1 32.5,23 34.5,25 J3.3
CLK2: J5.3 R3.1 | length 14.5
  Top Layer w0.33: R3.1 36.3,21.5 41.8,16 J5.3
GND: C1.1 C2.1 C3.1 C4.1 C6.2 C10.2 C11.2 J1.1 J1.MP1 J1.MP2 J2.1 J2.2 J3.1 J3.2 J4.1 J4.MP1 J4.MP2 J5.1 J5.2 MP1.1 MP2.1 MP3.1 MP4.1 R9.2 R12.1 TP2.1 U1.2 U2.8 U3.2 Y1.1 Y1.2 | length 0.8
  Top Layer w0.25: v1(19.5,22.4) R12.1
  other v1: 3.5,1.25 46.5,1.25 2.375,1.551 4.625,1.551 45.375,1.551 47.625,1.551 1.551,2.375 5.449,2.375 44.551,2.375 48.449,2.375 1.25,3.5 5.75,3.5 44.25,3.5 48.75,3.5 1.551,4.625 5.449,4.625 44.551,4.625 48.449,4.625 2.375,5.449 4.625,5.449 45.375,5.449 47.625,5.449 3.5,5.75 46.5,5.75 24.9,12.8 28.6,12.8 44.3,13.5 45,13.5 45.7,13.5 27.5,15.5 29,16.1 29.9,16.1 23,16.5 24.1,16.5 23.2,18.4 2.5,18.5 44.3,18.5 45,18.5 45.7,18.5 22.3,19.3 1.5,19.5 2.5,19.5 3.5,19.5 4.5,19.5 5.5,19.5 6.5,19.5 7.5,19.5 8.5,19.5 9.5,19.5 22.3,19.9 3.5,20.4 3.5,21.3 44.3,22.5 45,22.5 45.7,22.5 25.7,25 1,25.5 2,25.5 3,25.5 4,25.5 25.7,25.7 13.2,26.5 13.8,27.5 44.3,27.5 45,27.5 45.7,27.5 13.1,28.6 18.9,29.1 19.5,29.1 20.1,29.1 13.7,29.6 13.1,30.6 1,31 2,31 3,31 4,31 5.1,31 6.1,31 7,31 8,31 9,31 44.3,31.5 45,31.5 45.7,31.5 1.5,35 2.5,35 3.5,35 44.3,36.5 45,36.5 45.7,36.5 3.5,44.25 46.5,44.25 2.375,44.551 4.625,44.551 45.375,44.551 47.625,44.551 1.551,45.375 5.449,45.375 44.551,45.375 48.449,45.375 1.25,46.5 5.75,46.5 44.25,46.5 48.75,46.5 1.551,47.625 5.449,47.625 44.551,47.625 48.449,47.625 2.375,48.449 4.625,48.449 45.375,48.449 47.625,48.449 3.5,48.75 46.5,48.75
NetC3_2: C3.2 R6.2 R9.1 U3.4 | length 4.9
  Top Layer w0.25: U3.4 26,15.55 R6.2 R9.1 C3.2
NetC4_2: C4.2 R6.1 SJ1.1 U3.5
NetC5_1: C5.1 Y1.3 | length 2.3
  Top Layer w0.33: Y1.3 15.675,25.6 16.387,24.888 C5.1@16.588,24.888
NetC5_2: C5.2 R10.1 | length 1.5
  Top Layer w0.25: C5.2 R10.1
NetC9_1: C9.1 U2.2 | length 2.4
  Top Layer w0.25: C9.1 21.175,23.025 23.25,23.025 U2.2
NetC9_2: C9.2 R10.2 R12.2 | length 3
  Top Layer w0.33: R10.2 C9.2
NetR1_2: R1.2 U2.10 | length 2.4
  Top Layer w0.25: U2.10 28.725,23.5 29.7,24.475 R1.2
NetR2_2: R2.2 U2.9 | length 2
  Top Layer w0.25: U2.9 R2.2
NetR3_2: R3.2 U2.6 | length 2
  Top Layer w0.25: U2.6 R3.2
NetR7_2: R7.2 U2.5 | length 2.4
  Top Layer w0.25: R7.2 21.175,21.475 23.25,21.475 U2.5
NetR8_1: R8.1 U3.3 | length 2
  Top Layer w0.33: R8.1 20,15.55 U3.3
NetR11_1: R11.1 U1.3 | length 5.3
  Top Layer w0.33: U1.3 21.899,28.6 22.8,28.6 22.993,28.793 22.993,31.668 23.8,32.475 R11.1
SCL: J4.3 R4.1 U2.4 | length 19.6
  Top Layer w0.25: J4.3 12.675,24.5 17.475,19.7 R4.1 ; R4.1@17.525,19.7 18.325,20.5 19.565,20.5 20,20.935 20,21.8 20.4,22.2 21.9,22.2 22.1,22 U2.4
SDA: J4.2 R5.1 R7.1 | length 15.6
  Top Layer w0.25: J4.2 13,22.5 16.6,18.9 18.175,18.9 18.975,19.7 R5.1 R7.1
VDDO: C11.1 SJ1.2 U2.7
VIN: D1.2 J1.2 | length 8.6
  Top Layer w0.5: J1.2@8.75,34 10.75,34 11.75,35 D1.2
pads on no net: U1.4 U2.3

## Polygon pours and split planes (outlines as drawn)
+5V on Top Layer "NONET_L-01_P-001" (solid, remove dead copper, pour order 29): 19.5,16.8 19.5,18.5 22.6,18.5 22.6,16.8
NetC4_2 on Top Layer "NONET_L-01_P-001" (solid, remove dead copper, pour order 28): 27.3,20.1 30.5,20.1 30.5,16.8 23.413,16.8 23.413,18.7 27.3,18.7
GND on Top Layer "NONET_L-01_P-001" (solid, remove dead copper, pour order 1): 22.7,26.5 23.4,26.5 31,26.5 31,29.3 25.4,29.3 25.4,27.8 20.8,27.8 20.8,28.9 22.5,28.9 22.6,29 22.6,29.8 18.5,29.8 18.5,26.5 22.1,26.5
+3.3V on Top Layer "+3.3V_L01_P002" (solid, remove dead copper, pour order 2): 23.4,32.5 23.4,29.5 31,29.5 31,32.5
+3.3V on Top Layer "NONET_L-01_P-001" (solid, remove dead copper, pour order 27): 19.5,20.8 19.5,22.6 16.9,22.6 16.9,20.8
+3.3V on Top Layer "+3.3V_L01_P003" (solid, remove dead copper, pour order 3): 17,31 15.2,31 15.2,27.8 17,27.8
+3.3V on Top Layer "+3.3V_L01_P005" (solid, remove dead copper, pour order 5): 22,26 22,23.3 24,23.3 24,26
GND on Top Layer "GND_L01_P021" (solid, remove dead copper, pour order 21): 0.5,38 0.5,17 10,17 10,38
GND on Top Layer "GND_L01_P025" (solid, remove dead copper, pour order 25): 0,6.5 0,0 50,0 50,6.5
GND on Top Layer "GND_L01_P024" (solid, remove dead copper, pour order 24): 0,50 50,50 50,43.25 0,43.25
GND on Top Layer "NONET_L-01_P-001" (solid, remove dead copper, pour order 23): 22,19 22.7,19 22.7,17 21,17 21,16 22.7,16 22.7,12 30.5,12 30.5,16.8 23.75,16.8 23.75,20.25 22,20.25
GND on Top Layer "NONET_L-01_P-001" (solid, remove dead copper, pour order 17): 46.1,13.1 43.9,13.1 43.9,15.1 46.1,15.1
GND on Top Layer "NONET_L-01_P-001" (solid, remove dead copper, pour order 16): 43.9,18.9 46.1,18.9 46.1,16.9 43.9,16.9
GND on Top Layer "NONET_L-01_P-001" (solid, remove dead copper, pour order 15): 46.1,22.1 43.9,22.1 43.9,24.1 46.1,24.1
GND on Top Layer "NONET_L-01_P-001" (solid, remove dead copper, pour order 14): 43.9,27.9 46.1,27.9 46.1,25.9 43.9,25.9
GND on Top Layer "NONET_L-01_P-001" (solid, remove dead copper, pour order 13): 46.1,31.1 43.9,31.1 43.9,33.1 46.1,33.1
GND on Top Layer "NONET_L-01_P-001" (solid, remove dead copper, pour order 12): 43.9,36.9 46.1,36.9 46.1,34.9 43.9,34.9
VDDO on Top Layer "NONET_L-01_P-001" (solid, remove dead copper, pour order 8): 24.2,22.3 24.2,21.2 23.9,21.2 23.9,18.8 26.2,18.8 26.2,21.7 28.5,21.7 28.5,22.3
GND on Top Layer "NONET_L-01_P-001" (solid, remove dead copper, pour order 6): 28.5,22.7 26.9,22.7 26.9,26 24.2,26 24.2,22.3 28.5,22.3
GND on Top Layer "GND_L01_P004" (solid, remove dead copper, pour order 4): 14.8,31 14.8,26.1 12.8,26.1 12.8,31
+5V on Top Layer "+5V_L01_P000" (solid, remove dead copper, pour order 0): 19.5,36.4 19.5,33.4 17.3,33.4 17.3,30 22.7,30 22.7,36.4
GND on Layer 2 "NONET_L-01_P-001" (solid, remove dead copper, pour order 18): 0.124,50.383 0.124,0.383 50.124,0.383 50.124,50.383
GND on Bottom Layer "NONET_L-01_P-001" (solid, remove dead copper, pour order 20): 0,50 0,0 50,0 50,50
+3.3V on Layer 3 "NONET_L-01_P-001" (solid, remove dead copper, pour order 22): 0,0 50,0 50,50 0,50

## Other copper
Bottom Layer:
  rectangle net +5V: 20.3,30.7 22.7,31.7
  rectangle net +5V: 19.517,17.7 22.7,18.624

## Silkscreen, mask and mechanical layers (free items; w line width, h text height)
Top Overlay:
  rectangle: 9.5,7 19.5,9
  rectangle: 10.5,9.5 18.5,17.5
  text ".VersionControl_RevNumberShort" at 22.75,37.666 h2.5
  text ".board_name / .board_revision.- / Git ID :" at 11,37.5 h2.5
  text "+5V" at 11,33.285 h2
  text "CLK0" at 48.465,32.25 h2 r90
  text "GND" at 11.25,31.535 h2
  text "+3.3V" at 30.75,30.535 h2
  text "GND" at 30.75,27.535 h2
  text "SCL" at 11.25,24.035 h2
  text "CLK1" at 48.465,23.25 h2 r90
  text "SDA" at 11.25,22.035 h2
  text "GND" at 11.25,20.035 h2
  text "CLK2" at 48.465,14.25 h2 r90
Top Solder:
  rectangle: 0,43.25 50,50
  rectangle: 0,0 50,6.5
Bottom Solder:
  rectangle: 0,36.25 50,50
  rectangle: 0,0 50,13.75
Board outline:
  the board outline again, w0.1
Fab Notes:
  drawing of 196 lines, arcs and shapes, not listed
  text "Layer" at 68.191,47.191 h2
  text "Name" at 76.413,47.191 h2
  text "Material" at 92.669,47.191 h2
  text "Thickness" at 103.913,47.191 h2
  text "Constant" at 115.42,47.191 h2
  text "Board Layer Stack" at 126.462,47.191 h2
  text "Top Overlay" at 76.413,43.191 h2
  text "Top Solder" at 76.413,39.191 h2
  text "SM-001" at 92.669,39.191 h2
  text "0.025mm" at 103.913,39.191 h2
  text "4" at 115.42,39.191 h2
  text "1" at 68.191,35.191 h2
  text "Top Layer" at 76.413,35.191 h2
  text "CF-004" at 92.669,35.191 h2
  text "0.035mm" at 103.913,35.191 h2
  text "Dielectric 2" at 76.413,31.191 h2
  text "PP-022" at 92.669,31.191 h2
  text "0.208mm" at 103.913,31.191 h2
  text "4.5" at 115.42,31.191 h2
  text "2" at 68.191,27.191 h2
  text "Layer 2" at 76.413,27.191 h2
  text "CF-003" at 92.669,27.191 h2
  text "0.018mm" at 103.913,27.191 h2
  text "Dielectric 3" at 76.413,23.191 h2
  text "Core-042" at 92.669,23.191 h2
  text "0.991mm" at 103.913,23.191 h2
  text "4.6" at 115.42,23.191 h2
  text "3" at 68.191,19.191 h2
  text "Layer 3" at 76.413,19.191 h2
  text "CF-003" at 92.669,19.191 h2
  text "0.018mm" at 103.913,19.191 h2
  text "Dielectric 5" at 76.413,15.191 h2
  text "PP-022" at 92.669,15.191 h2
  text "0.208mm" at 103.913,15.191 h2
  text "4.5" at 115.42,15.191 h2
  text "4" at 68.191,11.191 h2
  text "Bottom Layer" at 76.413,11.191 h2
  text "CF-004" at 92.669,11.191 h2
  text "0.035mm" at 103.913,11.191 h2
  text "Bottom Solder" at 76.413,7.191 h2
  text "SM-001" at 92.669,7.191 h2
  text "0.025mm" at 103.913,7.191 h2
  text "4" at 115.42,7.191 h2
  text "Bottom Overlay" at 76.413,3.191 h2
  text "PCB Ordering guideline / ---------------------------- / 1. Layer count : .Layer_Count / 2. Dimensions : .Board_Width x .Board_Height / 3. PCB Thickness : 1.6mm / 4. PCB Color : green / 5. Silkscreen : white / 6. Material type : FR4-TG155 / 7. Surface finish : ENIG / 8. Gold thickness : 1U\" / 9. Outer copper weight : 1oz / 10. Inner copper weight : 0.5oz / 11. Impedance control : Yes / 12. Layer stackup : JLC0616H-3313 / 13. Via covering : Epoxy filled & capped / 14. Minimum via hole diameter : 0.3/0.4mm / 15. Board outline tolerance : +/- 0.2mm / 16. Mark on PCB : 2D bardcode & Number | Data Matrix Code | .board_name _ABCDE_0001 | 8x8mm / 17. Gold fingers : No / 18. Castellated holes : No / 19. Hole count : .Hole_Count / 20. Minimum hole size : .Hole_Size_Min / 21. SMD solder joints : .PadSMD_Count / 22. Through-hole solder joints : .PadThru_Count" at 65.5,-62.435 h3